# Altium PCB 家庭版电针仪.PcbDoc (part 1 of 2)
Units mm, origin at the board's own origin, x right, y up, seen from the top; angles counter-clockwise.
Board outline 170 x 90 mm, 2 copper layers (Top Layer, Bottom Layer); 197 components, 135 nets, 622 pads, 473 vias.
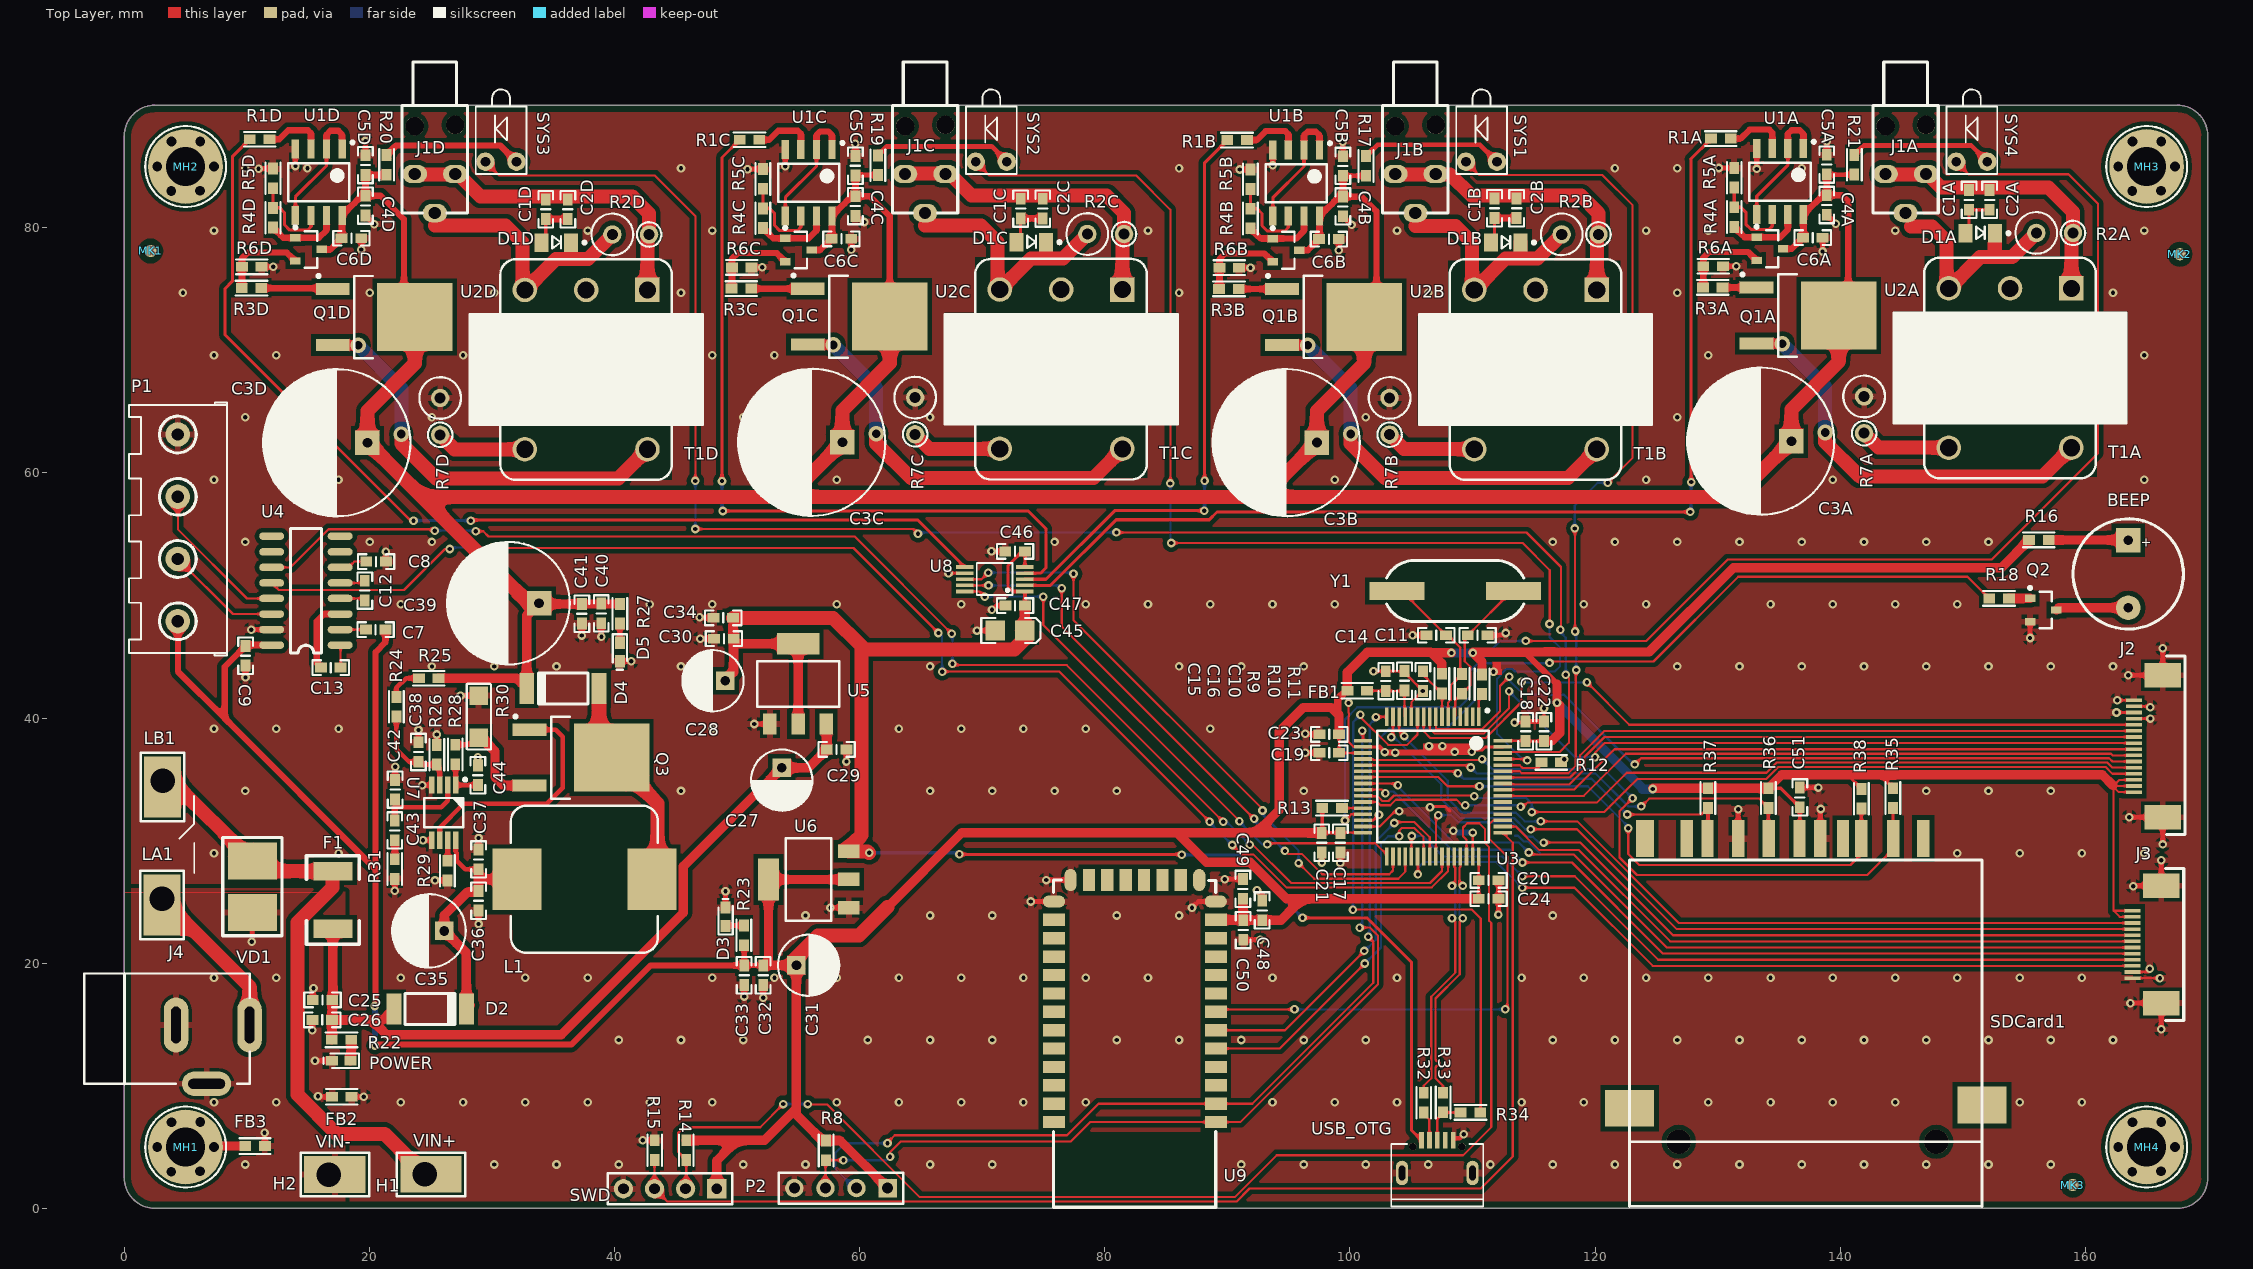
[diagram p0: Top Layer view]
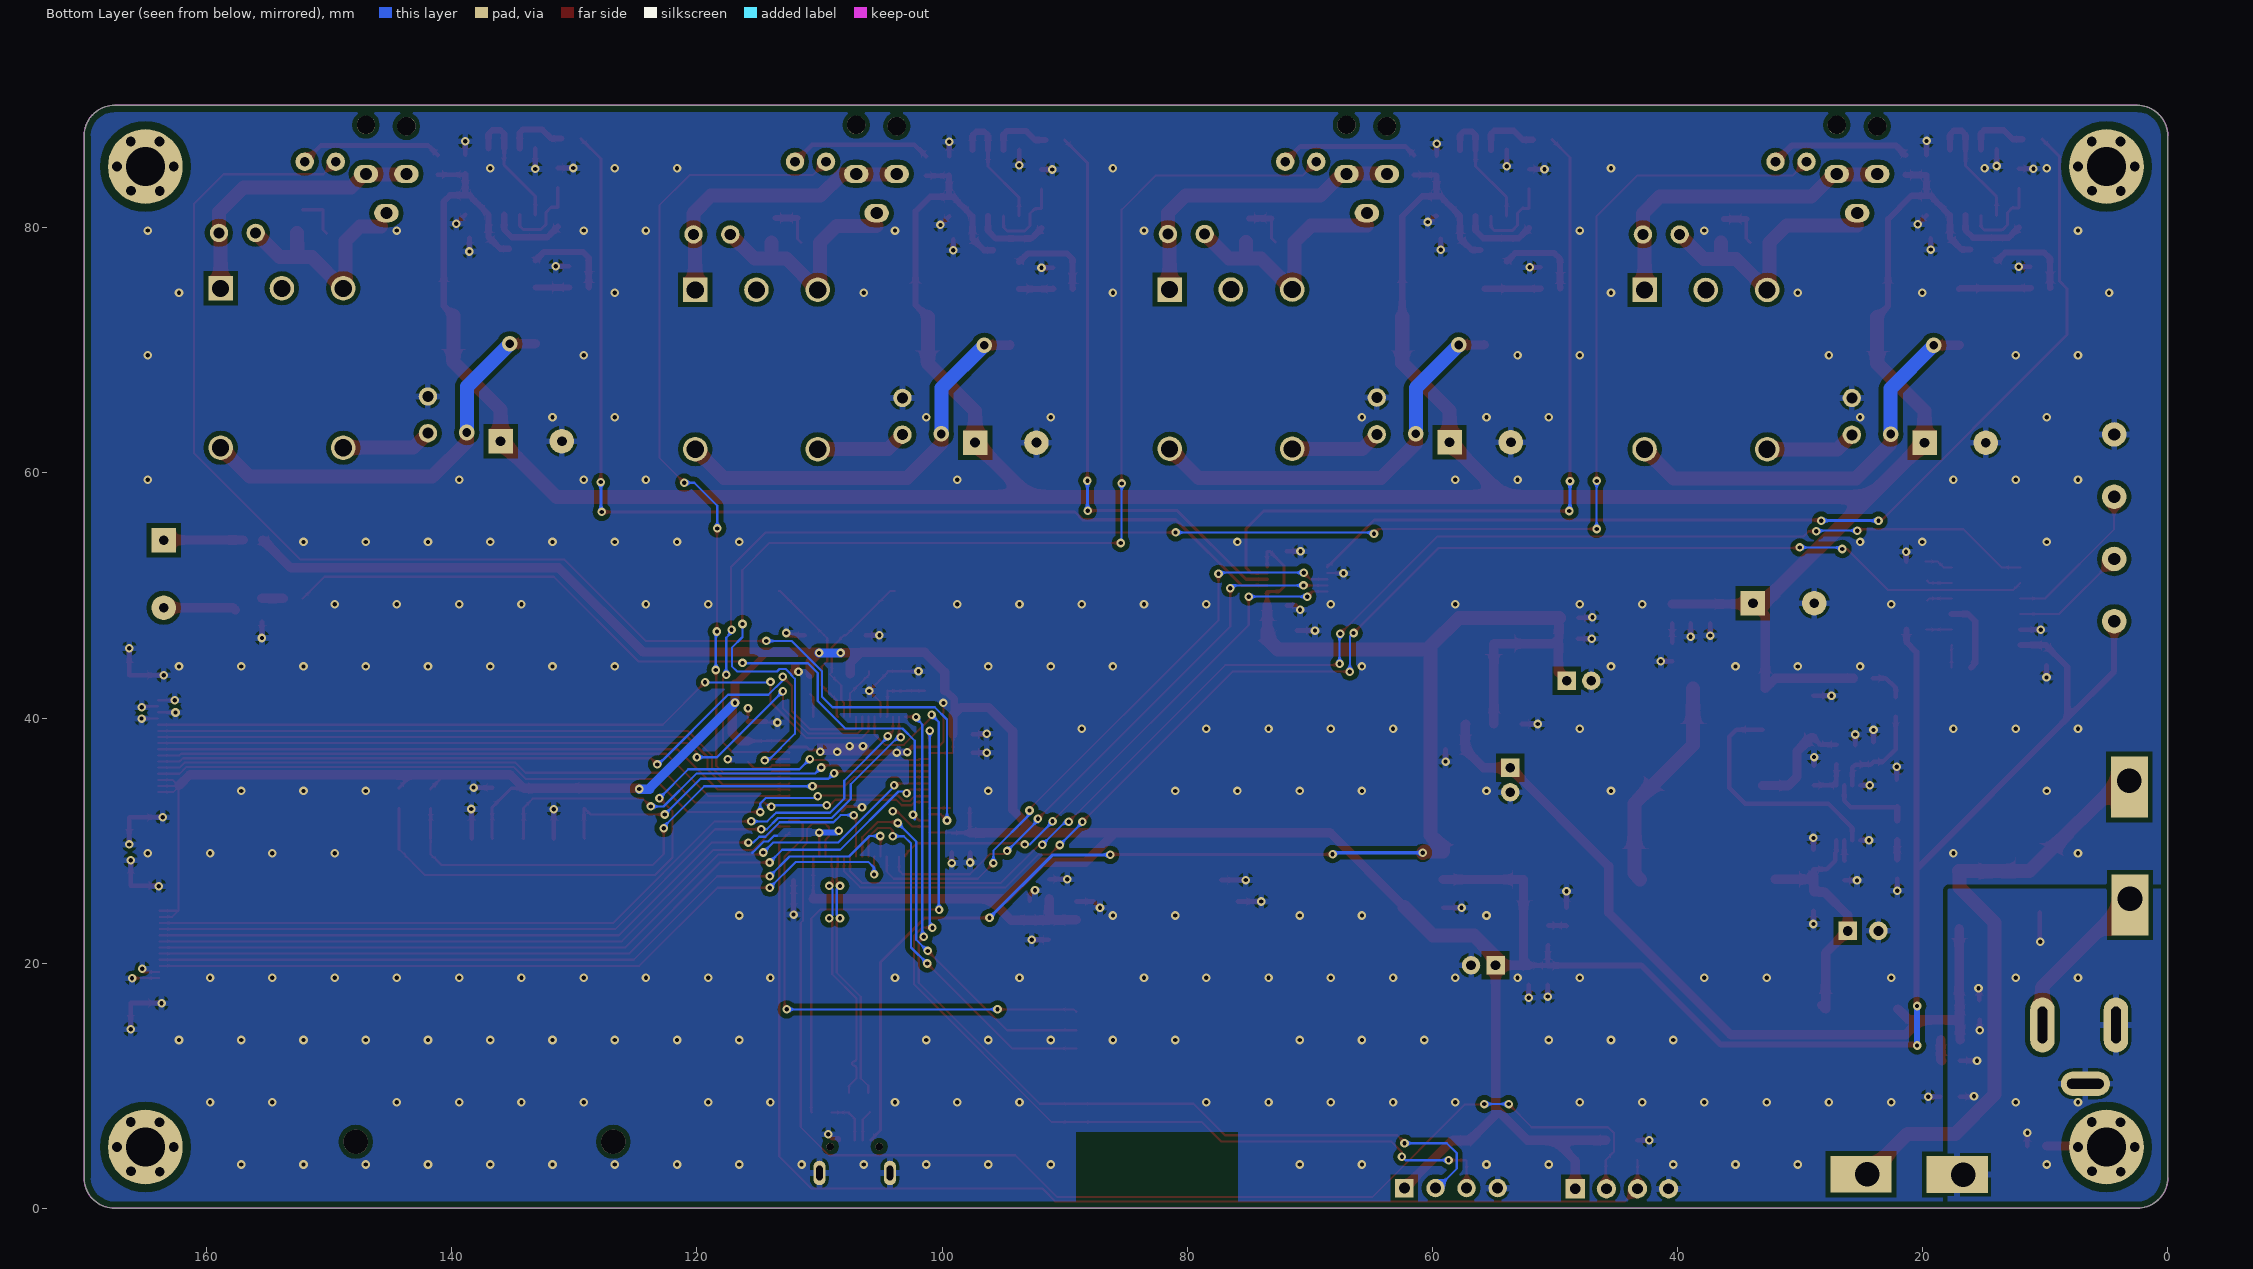
[diagram p1: Bottom Layer view, seen from below]

## Layer stack, top to bottom
Top Solder: solder mask 0.0102, Solder Resist, Dk 3.5
Top Layer: signal copper 0.0356
Dielectric 1: dielectric 0.32, FR-4, Dk 4.8
Bottom Layer: signal copper 0.0356
Bottom Solder: solder mask 0.0102, Solder Resist, Dk 3.5

## Board outline
2.5,0 cw(c2.5,2.5) 0,2.5 0,87.5 cw(c2.5,87.5) 2.5,90 167.5,90 cw(c167.5,87.5) 170,87.5 170,2.5 cw(c167.5,2.5) 167.5,0

## Design rules (kind name [scope] priority, off if disabled: settings)
AcuteAngle [All] p1: minimum=4.50000000000000E+0001 checktracksonly=TRUE // 默认角
Clearance Clearance_MK [(Component Like 'MK*')] p1: gap=0.508
Clearance Clearance_keep [InPolygon vs OnLayer('Keep-Out Layer')] p2: gap=0.508
Clearance Clearance_MH [InPolygon vs HasFootprint('AS_D3mm-6mm')] p3: gap=0.635
Clearance Clearance_poly [InPolygon] p4: gap=0.381 // 更改敷铜间距设置，默认20mil
Clearance Clearance_via_all [isvia] p5: gap=0.178 // 过孔安全间距设置，默认7mil
Clearance Clearance_pad_all [ispad] p6: gap=0.178 // 焊盘安全间距设置，默认7mil
Clearance Clearance_All [All] p7: gap=0.178 // 全局安全间距设置，默认7mil
ComponentClearance [All] p1: gap=0.102 collisioncheckmode=3 verticalgap=0.102 showdistances=FALSE
DiffPairsRouting DiffPairsRouting_all [(InDifferentialPairClass('All Differential Pairs'))] p1: maxlimit=0.178 minlimit=0.178 mostfreqgap=0.178 toplayer_minwidth=0.381 toplayer_maxwidth=0.381 toplayer_prefwidth=0.381 bottomlayer_minwidth=0.381 bottomlayer_maxwidth=0.381 bottomlayer_prefwidth=0.381 maxuncoupledlength=12.7 // 更改差分在每层
HoleSize [All] p1: absolutevalues=TRUE maxlimit=10 minlimit=0.025 maxpercent=80.000 minpercent=20.000
HoleToHoleClearance [All] p1: gap=0.102 allowstackedmicrovias=TRUE
Length [All] p1: maxlimit=2539.975 minlimit=0
MatchedLengths DiffPair_MatchedLengths [InDifferentialPair ('RXIN1') Or InDifferentialPair ('RXIN2') Or InDifferentialPair ('RXIN0') Or InDifferentialPair ('RXCLK')] p1: tolerance=2.54 checknetsindiffpair=TRUE checkdiffpairvsdiffpair=TRUE checkothers=TRUE
MinimumSolderMaskSliver [All] p1: minsoldermaskwidth=0.102
PlaneClearance PlaneClearance_via [isvia] p1: clearance=0.508 // 过孔在Plane层的隔离大小设置，在过孔密
PlaneClearance PlaneClearance_all [All] p2: clearance=0.508
PlaneConnect PlaneConnect_via [isvia] p1: planeconnectstyle=Direct reliefexpansion=0.508 reliefentries=4 reliefconductorwidth=0.254 reliefairgap=0.254 // 电源地在plane层过孔全连接
PlaneConnect PlaneConnect_all [All] p2: planeconnectstyle=Relief reliefexpansion=0.508 reliefentries=4 reliefconductorwidth=0.254 reliefairgap=0.254
PolygonConnect PolygonConnect_DGND [InNet('DGND')] p1: connectstyle=Relief reliefconductorwidth=0.508 reliefentries=4 polygonreliefangle="90 Angle" airgapwidth=0.254
PolygonConnect PolygonConnect_via [isvia] p2: connectstyle=Direct reliefconductorwidth=0.254 reliefentries=4 polygonreliefangle="90 Angle" airgapwidth=0.254 // 敷铜过孔全连接
PolygonConnect PolygonConnect_AGND [InNet('AGND')] p3: connectstyle=Relief reliefconductorwidth=0.508 reliefentries=4 polygonreliefangle="90 Angle" airgapwidth=0.254 // 敷铜过孔全连接
PolygonConnect PolygonConnect_all [All] p4: connectstyle=Direct reliefconductorwidth=0.254 reliefentries=4 polygonreliefangle="90 Angle" airgapwidth=0.254
RoutingCorners [All] p1: cornerstyle=45-Degree minsetback=1.27 maxsetback=1.27
RoutingVias RoutingVias_all [All] p1: holewidth=0.35 width=0.7 viastyle="Through Hole" minholewidth=0.35 minwidth=0.7 maxholewidth=0.9 maxwidth=1.27 // 更改过孔设置，默认最小12/24mil 最大20/40mil
SMDNeckDown [All] p1: percent=200.000
ShortCircuit [(Component Like 'MH*') vs InNet('No Net') and isvia] p1: allowed=TRUE
SilkToSilkClearance [All] p1: silktosilkclearance=0.102
SilkToSolderMaskClearance SilkscreenOverComponentPads [IsPad] p1: minsilkscreentomaskgap=0.102 clearancetoexposedcopper=TRUE
SolderMaskExpansion [All] p1: expansion=0.102
Width Width_all [All] p1: maxlimit=2.54 minlimit=0.178 preferedwidth=0.178
19 further rules are at their usual default settings.

## Classes and differential pairs
component class DAC1: C1A C2A C3A C4A C5A C6A D1A J1A Q1A R1A R2A R3A R4A R5A R6A R7A T1A U1A U2A
component class DAC2: C1B C2B C3B C4B C5B C6B D1B J1B Q1B R1B R2B R3B R4B R5B R6B R7B T1B U1B U2B
component class DAC3: C1C C2C C3C C4C C5C C6C D1C J1C Q1C R1C R2C R3C R4C R5C R6C R7C T1C U1C U2C
component class DAC4: C1D C2D C3D C4D C5D C6D D1D J1D Q1D R1D R2D R3D R4D R5D R6D R7D T1D U1D U2D
component class MCU: BEEP C7 C8 C9 C10 C11 C12 C13 C14 C15 C16 C17 C18 C19 C20 C21 C22 C23 C24 C48 C49 C50 C51 FB1 J2 J3 P1 P2 Q2 R8 R9 R10 R11 R12 R13 R14 R15 R16 R17 R18 R19 R20 R21 R32 R33 R34 R35 R36 R37 R38 SDCard1 SWD SYS1 SYS2 SYS3 SYS4 U3 U4 U9 USB_OTG Y1
component class U_P01-Power: C25 C26 C27 C28 C29 C30 C31 C32 C33 C34 C35 C36 C37 C38 C39 C40 C41 C42 C43 C44 D2 D3 D4 D5 F1 FB2 FB3 H1 H2 J4 L1 LA1 LB1 MH1 MH2 MH3 MH4 MK1 MK2 MK3 POWER Q3 R22 R23 R24 R25 R26 R27 R28 R29 R30 R31 U5 U6 U7 VD1
component class U_P03-DAC_OUTPUT: C45 C46 C47 U8
net class DAC_OUT[1..4]: DAC_OUT1 DAC_OUT2 DAC_OUT3 DAC_OUT4
channel class DAC_OUT: DAC1 DAC2 DAC3 DAC4
differential pair USB: +USB_P -USB_N

## Components (designator, comment, footprint, x,y, rotation, side; value= is the part's Value field where it differs from the comment)
BEEP "BEEP" 蜂鸣器 163.5,54.5 r270 top
C1A "100pF" Cap0603 150.509,82.275 r90 top (schematic designator C1)
C1B "100pF" Cap0603 111.792,81.597 r90 top (schematic designator C1)
C1C "100pF" Cap0603 73.133,81.571 r90 top (schematic designator C1)
C1D "100pF" Cap0603 34.38,81.513 r90 top (schematic designator C1)
C2A "100pF" Cap0603 152.185,82.275 r90 top (schematic designator C2)
C2B "100pF" Cap0603 113.595,81.597 r90 top (schematic designator C2)
C2C "100pF" Cap0603 74.936,81.571 r90 top (schematic designator C2)
C2D "100pF" Cap0603 36.184,81.513 r90 top (schematic designator C2)
C3A "220uF/50V" CapPol1_D12 133.516,62.593 r180 top (schematic designator C3)
C3B "220uF/50V" CapPol1_D12 94.799,62.474 r180 top (schematic designator C3)
C3C "220uF/50V" CapPol1_D12 56.09,62.499 r180 top (schematic designator C3)
C3D "220uF/50V" CapPol1_D12 17.337,62.466 r180 top (schematic designator C3)
C4A "10nf" Cap0603 138.901,81.864 r90 top (schematic designator C4)
C4B "10nf" Cap0603 99.422,81.745 r90 top (schematic designator C4)
C4C "10nf" Cap0603 59.646,81.77 r90 top (schematic designator C4)
C4D "10nf" Cap0603 19.674,81.813 r90 top (schematic designator C4)
C5A "100nf" Cap0603 138.901,85.166 r270 top (schematic designator C5)
C5B "100nf" Cap0603 99.422,85.047 r270 top (schematic designator C5)
C5C "100nf" Cap0603 59.646,85.072 r270 top (schematic designator C5)
C5D "100nf" Cap0603 19.674,85.115 r270 top (schematic designator C5)
C6A "100nf" Cap0603 137.758,79.197 r180 top (schematic designator C6)
C6B "100nf" Cap0603 98.279,79.078 r180 top (schematic designator C6)
C6C "100nf" Cap0603 58.503,79.103 r180 top (schematic designator C6)
C6D "100nf" Cap0603 18.531,79.146 r180 top (schematic designator C6)
C7 "0.1u" Cap0603 20.506,47.219 r0 top
C8 "0.1u" Cap0603 20.542,52.765 r0 top
C9 "0.1u" Cap0603 9.888,45.085 r270 top
C10 "100nf" Cap0603 105.948,43.017 r90 top
C11 "22pf" Cap0603 110.414,46.761 r180 top
C12 "0.1u" Cap0603 19.621,50.399 r270 top
C13 "0.1u" Cap0603 16.848,44.12 r0 top
C14 "22pf" Cap0603 107.036,46.761 r0 top
C15 "100nf" Cap0603 102.926,43.017 r270 top
C16 "10nf" Cap0603 104.45,43.042 r270 top
C17 "100nf" Cap0603 99.217,29.834 r90 top
C18 "100nf" Cap0603 114.33,38.928 r270 top
C19 "100nf" Cap0603 98.303,37.175 r0 top
C20 "100nf" Cap0603 111.314,26.761 r180 top
C21 "10uf/16V" Cap0603 97.693,29.834 r90 top
C22 "10uf/16V" Cap0603 115.829,38.928 r270 top
C23 "10uf/16V" Cap0603 98.303,38.674 r0 top
C24 "10uf/16V" Cap0603 111.314,25.263 r180 top
C25 "1uf" Cap0603 16.168,17 r0 top
C26 "100nf" Cap0603 16.143,15.375 r0 top
C27 "10uF/25V" CapPol1_D5 53.639,34.944 r270 top
C28 "22uF/16V" CapPol1_D5 48.026,43.046 r180 top
C29 "100nf" Cap0603 58.115,37.44 r180 top
C30 "100nf" Cap0603 48.916,46.48 r0 top
C31 "22uF/16V" CapPol1_D5 55.832,19.833 r0 top
C32 "100nf" Cap0603 52.123,19.02 r90 top
C33 "10nf" Cap0603 50.574,19.02 r90 top
C34 "100nf" Cap0603 48.865,48.181 r0 top
C35 "47uF/25V" CapPol1_D6 24.855,22.639 r180 top
C36 "1uf" Cap0603 28.901,25.093 r90 top
C37 "100nf" Cap0603 28.901,28.471 r270 top
C38 "100nf" Cap0603 23.999,37.234 r270 top
C39 "470uF/50V" CapPol1_D10 31.339,49.375 r180 top
C40 "10uf" Cap0603 37.334,48.512 r90 top
C41 "100nf" Cap0603 38.908,48.537 r90 top
C42 "1nf" Cap0603 22.094,34.161 r270 top
C43 "22nf" Cap0603 22.068,30.833 r90 top
C44 "10nf" Cap0603 28.85,35.329 r270 top
C45 "10uF/16V" CAPPLO3_A_3216-18 72.263,47.142 r180 top
C46 "1u" Cap0603 72.679,53.602 r0 top
C47 "0.1u" Cap0603 72.683,49.18 r0 top
C48 "22u" Cap0603 92.837,24.308 r270 top
C49 "4.7u" Cap0603 91.262,26.06 r270 top
C50 "0.1u" Cap0603 91.288,22.708 r90 top
C51 "0.1u" Cap0603 136.703,33.528 r90 top
D1A "IN4148" DIOMELF2513N 151.525,77.706 r0 top (schematic designator D1)
D1B "IN4148" DIOMELF2513N 112.808,76.949 r0 top (schematic designator D1)
D1C "IN4148" DIOMELF2513N 74.098,76.974 r0 top (schematic designator D1)
D1D "IN4148" DIOMELF2513N 35.345,76.941 r0 top (schematic designator D1)
D2 "1N5822" 1N5822 22.01,16.264 r0 top
D3 "RED" LED0603 49.05,23.643 r90 top
D4 "1N5822" 1N5822 38.731,42.416 r180 top
D5 "RED" LED0603 40.432,45.54 r270 top
F1 "2A/20V" 1812 15.113,27.534 r270 top
FB1 "0R,5%" FB0603 100.589,42.23 r0 top
FB2 "0R" FB0603 17.748,9.1 r0 top
FB3 "0R" FB0603 10.668,5.08 r180 top
H1 "VIN+" HOLE_POWER 24.522,2.776 r180 top
H2 "VIN-" HOLE_POWER 16.67,2.758 r180 top
J1A "安规插头" 安规插头 148,93.396 r270 top (schematic designator J1)
J1B "安规插头" 安规插头 108,93.396 r270 top (schematic designator J1)
J1C "安规插头" 安规插头 68,93.396 r270 top (schematic designator J1)
J1D "安规插头" 安规插头 28,93.396 r270 top (schematic designator J1)
J2 "FPC16_0.5" FPC0.5-16P 166.04,37.592 r90 top
J3 "FPC12-0.5" FPC0.5-12P 165.024,21.539 r270 top
J4 "PWR2.5" KLD-0202 4.216,14.961 r0 top
L1 "330mH" Inductor_12x12x7 37.537,26.845 r0 top
LA1 "HOLE_POWER" HOLE_POWER 3.073,25.248 r90 top
LB1 "HOLE_POWER" HOLE_POWER 3.124,34.874 r90 top
MH1 "MH" AS_D3mm-6mm 5,5 r0 top
MH2 "MH" AS_D3mm-6mm 5,85 r0 top
MH3 "MH" AS_D3mm-6mm 165,85 r0 top
MH4 "MH" AS_D3mm-6mm 165,5 r0 top
MK1 "Mark" MK 2.147,78.112 r0 top
MK2 "Mark" MK 167.711,77.847 r90 top
MK3 "Mark" MK 158.975,1.9 r90 top
P1 "接线柱" 4P接线柱5.08mm 4.369,47.904 r90 top
P2 "Header 4" HDR1X4#1 62.281,1.651 r180 top
POWER "RED" LED0603 17.845,12.047 r180 top
Q1A "S8050" SOT-23B 134.253,78.29 r0 top (schematic designator Q1)
Q1B "S8050" SOT-23B 94.774,78.171 r0 top (schematic designator Q1)
Q1C "S8050" SOT-23B 54.997,78.196 r0 top (schematic designator Q1)
Q1D "S8050" SOT-23B 15.025,78.239 r0 top (schematic designator Q1)
Q2 "S8050" SOT-23B 156.566,48.819 r0 top
Q3 "IPI04N03LA" TO228 36.851,36.599 r270 top
R1A "1K,5%" Res0603 130.265,87.278 r0 top (schematic designator R1)
R1B "1K,5%" Res0603 90.786,87.159 r0 top (schematic designator R1)
R1C "1K,5%" Res0603 51.01,87.185 r0 top (schematic designator R1)
R1D "1K,5%" Res0603 11.038,87.228 r0 top (schematic designator R1)
R2A "30K/1W" Res_Power_5.0_4.0 155.995,79.585 r0 top (schematic designator R2)
R2B "30K/1W" Res_Power_5.0_4.0 117.278,79.466 r0 top (schematic designator R2)
R2C "30K/1W" Res_Power_5.0_4.0 78.569,79.492 r0 top (schematic designator R2)
R2D "30K/1W" Res_Power_5.0_4.0 39.816,79.458 r0 top (schematic designator R2)
R3A "22R,5%" Res0603 129.605,75.14 r180 top (schematic designator R3)
R3B "22R,5%" Res0603 90.126,75.021 r180 top (schematic designator R3)
R3C "22R,5%" Res0603 50.349,75.047 r180 top (schematic designator R3)
R3D "22R,5%" Res0603 10.377,75.09 r180 top (schematic designator R3)
R4A "30k,1%" Res0603 131.357,80.881 r90 top (schematic designator R4)
R4B "30k,1%" Res0603 91.878,80.762 r90 top (schematic designator R4)
R4C "30k,1%" Res0603 52.102,80.787 r90 top (schematic designator R4)
R4D "30k,1%" Res0603 12.13,80.83 r90 top (schematic designator R4)
R5A "10K,1%" Res0603 131.357,84.081 r270 top (schematic designator R5)
R5B "10K,1%" Res0603 91.878,83.962 r270 top (schematic designator R5)
R5C "10K,1%" Res0603 52.102,83.987 r270 top (schematic designator R5)
R5D "10K,1%" Res0603 12.13,84.03 r270 top (schematic designator R5)
R6A "470R,5%" Res0603 129.63,76.868 r180 top (schematic designator R6)
R6B "470R,5%" Res0603 90.151,76.748 r180 top (schematic designator R6)
R6C "470R,5%" Res0603 50.375,76.774 r180 top (schematic designator R6)
R6D "470R,5%" Res0603 10.403,76.817 r180 top (schematic designator R6)
R7A "1R/1W" Res_Power_5.0_4.0 141.949,66.243 r270 top (schematic designator R7)
R7B "1R/1W" Res_Power_5.0_4.0 103.232,66.124 r270 top (schematic designator R7)
R7C "1R/1W" Res_Power_5.0_4.0 64.522,66.149 r270 top (schematic designator R7)
R7D "1R/1W" Res_Power_5.0_4.0 25.77,66.116 r270 top (schematic designator R7)
R8 "10K,5%" Res0603 57.252,4.724 r90 top
R9 "10K,5%" Res0603 107.498,42.814 r90 top
R10 "1M,5%" Res0603 109.149,42.788 r90 top
R11 "10K,5%" Res0603 110.774,42.763 r90 top
R12 "10K,5%" Res0603 116.424,36.389 r180 top
R13 "10K,5%" Res0603 98.538,32.654 r0 top
R14 "10K,5%" Res0603 45.847,4.75 r90 top
R15 "10K,5%" Res0603 43.282,4.75 r90 top
R16 "22,5%" Res0603 156.21,54.534 r180 top
R17 "5K,5%" Res0603 101.309,85.048 r90 top
R18 "100,5%" Res0603 152.959,49.759 r180 top
R19 "5K,5%" Res0603 61.486,85.109 r90 top
R20 "5K,5%" Res0603 21.395,85.137 r90 top
R21 "5K,5%" Res0603 141.152,85.141 r90 top
R22 "4K7,5%" Res0603 17.718,13.749 r180 top
R23 "510R,5%" Res0603 50.548,22.271 r270 top
R24 "3K3,5%" Res0603 22.195,40.917 r270 top
R25 "10K,5%" Res0603 24.837,43.254 r0 top
R26 "1K,5%" Res0603 25.497,37.005 r90 top
R27 "4K7,5%" Res0603 40.432,48.512 r90 top
R28 "100R,5%" Res0603 26.996,37.031 r90 top
R29 "200K,5%" Res0603 26.361,27.557 r90 top
R30 "0.0033R" 1206A 28.926,41.831 r270 top
R31 "4K7,5%" Res0603 22.068,27.684 r90 top
R32 "10,5%" Res0603 106.019,8.63 r270 top
R33 "10,5%" Res0603 107.594,8.636 r270 top
R34 "1.5K,5%" Res0603 109.83,7.823 r180 top
R35 "45K,5%" Res0603 144.297,33.477 r90 top
R36 "45K,5%" Res0603 134.137,33.477 r90 top
R37 "45K,5%" Res0603 129.21,33.477 r90 top
R38 "45K,5%" Res0603 141.732,33.426 r90 top
SDCard1 "SDCard" SDCard 144.323,30.175 r180 top
SWD "Header 4" HDR1X4#2 48.336,1.6 r180 top
SYS1 "RED" 坐式LED 112,85.396 r180 top
SYS2 "RED" 坐式LED 72,85.396 r180 top
SYS3 "RED" 坐式LED 32,85.396 r180 top
SYS4 "RED" 坐式LED 152,85.396 r180 top
T1A "Transformer" Transformer_19_19 154.598,67.952 r180 top (schematic designator T1)
T1B "Transformer" Transformer_19_19 115.881,67.833 r180 top (schematic designator T1)
T1C "Transformer" Transformer_19_19 77.172,67.858 r180 top (schematic designator T1)
T1D "Transformer" Transformer_19_19 38.419,67.825 r180 top (schematic designator T1)
U1A "TLE2142CD" SOIC127P600X175-8N 135.091,83.769 r270 top (schematic designator U1)
U1B "TLE2142CD" SOIC127P600X175-8N 95.612,83.65 r270 top (schematic designator U1)
U1C "TLE2142CD" SOIC127P600X175-8N 55.836,83.675 r270 top (schematic designator U1)
U1D "TLE2142CD" SOIC127P600X175-8N 15.864,83.718 r270 top (schematic designator U1)
U2A "IPI04N03LA" TO228P1003X238-3N 137.377,72.847 r0 top (schematic designator U2)
U2B "IPI04N03LA" TO228P1003X238-3N 98.66,72.728 r0 top (schematic designator U2)
U2C "IPI04N03LA" TO228P1003X238-3N 59.95,72.753 r0 top (schematic designator U2)
U2D "IPI04N03LA" TO228P1003X238-3N 21.198,72.72 r0 top (schematic designator U2)
U3 "STM32F103RC" QFP50P1200X1200X160-64N 106.761,34.406 r270 top
U4 "MAX232" SO-16 17.61,45.949 r180 top
U5 "AMS1117-5.0" AMS1117 52.674,39.516 r0 top
U6 "AMS1117-3.3" AMS1117 59.108,24.532 r90 top
U7 "LM3478" SOP65P490X110-8N 26.056,32.281 r270 top
U8 "AD5304" MSOP10 73.466,50.325 r180 top
U9 "ELET114A" ELET114A 89.052,7.036 r180 top
USB_OTG "MicroUSB-B-H" MICROUSB-B-H 107.188,3.48 r90 top
VD1 "BF091M" B3D230L 10.439,26.238 r270 top
Y1 "8MHz" XTAL_49SMD 108.585,50.368 r180 top

## Footprints (in the part's own frame and the unit in brackets; to place one, negate y for a bottom-side part, rotate by r counter-clockwise, add the part's x,y. Pads: shape width x height; smd on the part's side, far side on the other; paste and mask are expansions set on the pad)
1N5822 [mm]
  rect 1.2x2.5 smd: A(0,0) C(5.9,0)
  silkscreen extent 0.89,-1.27 4.95,1.27
4P接线柱5.08mm [mm]
  round 2 hole 1: 1(0,0) 2(5.08,0) 3(10.16,0) 4(15.24,0)
  silkscreen extent -2.8,-4 17.84,4
1206A [mil]
  rect 60x60 smd: 1(0,0) 2(135,0)
  silkscreen extent -38,-39 173,39
1812 [mil]
  rect 60x125 smd: 1(1,75) 2(186,75)
  silkscreen extent -49,-10 236,160
AMS1117 [mm]
  rect 1.1x1.75 smd: 1(0,0) 2(2.3,0) 3(4.6,0)
  rect 3.45x1.75 smd: 4(2.3,6.55)
  silkscreen extent -1.05,1.43 5.65,5.13, body extent -0.95,-0.2 5.55,6.76, height 1.7
AS_D3mm-6mm [mm] "内径3mm，外径7mm"
  round 6.1 hole 3.2: MH1(0,0)
  silkscreen extent -3.3,-3.3 3.3,3.3
B3D230L [mm]
  rect 3x4 smd: 1(-2.1,0) 2(2.1,0)
  silkscreen extent -4,-2.41 4,2.41
Cap0603 [mm] "0603电容"
  rect 0.965x0.8 smd: 1(-0.8,0) 2(0.8,0)
  silkscreen extent -1.48,-0.6 1.48,0.6
CAPPLO3_A_3216-18 [mm] "A型封装=32*16-18(长*宽-高，单位:mm)"
  rect 1.6x1.6 smd: 1(-1.2,0) 2(1.2,0)
  silkscreen extent -2.48,-1.02 2.34,1.02
CapPol1_D5 [mm] "极性电容（径向）D5，间距F2.0"
  rect 1.5x1.5 hole 0.8: 1(-1,0)
  round 1.5 hole 0.8: 2(1,0)
  silkscreen extent -2.5,-2.54 2.54,2.54
CapPol1_D6 [mm] "极性电容（径向）D6，间距F2.5"
  rect 1.5x1.5 hole 0.8: 1(-1.25,0)
  round 1.524 hole 0.8: 2(1.25,0)
  silkscreen extent -3,-3 3,3
CapPol1_D10 [mm] "极性电容（径向）D10，间距F5.0"
  rect 2x2 hole 0.8: 1(-2.5,0)
  round 2 hole 0.8: 2(2.5,0)
  silkscreen extent -5,-5 5,5
CapPol1_D12 [mm] "极性电容（径向）D12，间距F5.0"
  rect 2x2 hole 0.8: 1(-2.5,0)
  round 2 hole 0.8: 2(2.5,0)
  silkscreen extent -6,-6 6,6
DIOMELF2513N [mm]
  rect 1.15x1.5 smd: A(-1.302,1.854) C(1.098,1.854)
  silkscreen extent -0.43,1.38 2.32,2.38
ELET114A [mm]
  rect 1.8x1 smd: 1(0,0) 2(0,-1.5) 3(0,-3) 4(0,-4.5) 5(0,-6) 6(0,-7.5) 7(0,-9) 8(0,-10.5) 9(0,-12) 10(0,-13.5) 11(0,-15) 12(0,-16.5) 23(13.2,-16.5) 24(13.2,-15) 25(13.2,-13.5) 26(13.2,-12) 27(13.2,-10.5) 28(13.2,-9) 29(13.2,-7.5) 30(13.2,-6) 31(13.2,-4.5) 32(13.2,-3) 33(13.2,-1.5) 34(13.2,0)
  oval 1.8x1 smd: 13(0,-18) 22(13.2,-18)
  oval 1x1.8 smd: 14(1.35,-19.75) 21(11.85,-19.75)
  rect 1x1.8 smd: 15(2.85,-19.75) 16(4.35,-19.75) 17(5.85,-19.75) 18(7.35,-19.75) 19(8.85,-19.75) 20(10.35,-19.75)
  silkscreen extent 0,-19.75 13.25,6.95
FB0603 [mm] "0603磁珠"
  rect 0.965x0.8 smd: 1(-0.8,0) 2(0.8,0)
  silkscreen extent -1.27,-0.64 1.27,0.64
FPC0.5-12P [mm] "FPC0.5-12P;0.5mm;"
  rect 0.3x1.3 smd mask+0.051: 1(-2.744,-1.175) 2(-2.244,-1.175) 3(-1.744,-1.175) 4(-1.244,-1.175) 5(-0.744,-1.175) 6(-0.244,-1.175) 7(0.256,-1.175) 8(0.756,-1.175) 9(1.256,-1.175) 10(1.756,-1.175) 11(2.256,-1.175) 12(2.756,-1.175)
  rect 2x3 smd mask+0.051: 13(-4.787,1.175) 14(4.788,1.175)
  silkscreen extent -6.2,1.5 6.2,3
FPC0.5-16P [mm] "FPC0.5-16P;0.5mm"
  rect 0.3x1.3 smd mask+0.051: 1(-3.633,2.081) 2(-3.133,2.081) 3(-2.633,2.081) 4(-2.133,2.081) 5(-1.633,2.081) 6(-1.133,2.081) 7(-0.633,2.081) 8(-0.133,2.081) 9(0.367,2.081) 10(0.867,2.081) 11(1.367,2.081) 12(1.867,2.081) 13(2.367,2.081) 14(2.867,2.081) 15(3.367,2.081) 16(3.867,2.081)
  rect 2x3 smd mask+0.051: 17(-5.676,-0.268) 18(5.91,-0.269)
  silkscreen extent -7.09,-2.09 7.47,-0.59
HDR1X4#1 [mm] "Connector; Header; 4 Position"
  rect 1.5x1.5 hole 0.9: 1(0,0)
  round 1.5 hole 0.9: 2(2.54,0) 3(5.08,0) 4(7.62,0)
  silkscreen extent -1.27,-1.27 8.89,1.27
HDR1X4#2 [mm]
  rect 1.575x1.575 hole 0.889: 1(0,0)
  round 1.575 hole 0.889: 2(2.54,0) 3(5.08,0) 4(7.62,0)
  silkscreen extent -1.27,-1.27 8.89,1.27
HOLE_POWER [mm] "电源接线孔"
  rect 5x3 hole 2 copper offset -0.5,0: 1(0,0)
  silkscreen extent -3.3,-1.78 2.29,1.78
Inductor_12x12x7 [mm]
  rect 4x5 smd: 1(-5.5,0) 2(5.5,0)
  silkscreen extent -6,-6 6,6
KLD-0202 [mm] "DC Power Jack, 2.5mm, KLD Series, PCB Mount"
  oval 4x2 hole 0.8 slot 3 at 0 deg: 2(2.5,-4.8)
  oval 2x4.5 hole 0.8 slot 3 at 90 deg: 3(0,0) 4(6,0)
  silkscreen extent -7.5,-4.8 6,4.2
LED0603 [mm]
  rect 1x0.8 smd: A(-0.6,0) K(0.9,0)
  silkscreen extent -1.3,-0.58 1.6,0.58
MICROUSB-B-H [mm]
  rect 1.35x0.4 smd mask+0.051: 1(2.082,1.363) 2(2.082,0.714) 3(2.082,0.064) 4(2.082,-0.587) 5(2.082,-1.236)
  oval 2x1 hole 0.5 slot 1.2 at 0 deg: 6(-0.593,2.939) 7(-0.593,-2.812)
  round 0.61 hole 0.61 mask+0.051: " "(1.557,2.063) " "(1.557,-1.936)
  silkscreen extent -3.34,-3.69 1.78,3.81
MK [mm] "贴片Mark点"
  round 1 smd mask+0.5: MK(0,0)
MSOP10 [mm]
  rect 1.4x0.3 smd: 1(0,0) 2(0,-0.5) 3(0,-1) 4(0,-1.5) 5(0,-2) 6(4.9,-2) 7(4.9,-1.5) 8(4.9,-1) 9(4.9,-0.5) 10(4.9,0)
  silkscreen extent 0.99,-2.34 3.91,0.28
QFP50P1200X1200X160-64N [mm] "QFP50P1200X1200X160-64N"
  rect 1.5x0.3 smd: 1(-5.7,3.75) 2(-5.7,3.25) 3(-5.7,2.75) 4(-5.7,2.25) 5(-5.7,1.75) 6(-5.7,1.25) 7(-5.7,0.75) 8(-5.7,0.25) 9(-5.7,-0.25) 10(-5.7,-0.75) 11(-5.7,-1.25) 12(-5.7,-1.75) 13(-5.7,-2.25) 14(-5.7,-2.75) 15(-5.7,-3.25) 16(-5.7,-3.75) 33(5.7,-3.75) 34(5.7,-3.25) 35(5.7,-2.75) 36(5.7,-2.25) 37(5.7,-1.75) 38(5.7,-1.25) 39(5.7,-0.75) 40(5.7,-0.25) 41(5.7,0.25) 42(5.7,0.75) 43(5.7,1.25) 44(5.7,1.75) 45(5.7,2.25) 46(5.7,2.75) 47(5.7,3.25) 48(5.7,3.75)
  rect 0.3x1.5 smd: 17(-3.75,-5.7) 18(-3.25,-5.7) 19(-2.75,-5.7) 20(-2.25,-5.7) 21(-1.75,-5.7) 22(-1.25,-5.7) 23(-0.75,-5.7) 24(-0.25,-5.7) 25(0.25,-5.7) 26(0.75,-5.7) 27(1.25,-5.7) 28(1.75,-5.7) 29(2.25,-5.7) 30(2.75,-5.7) 31(3.25,-5.7) 32(3.75,-5.7) 49(3.75,5.7) 50(3.25,5.7) 51(2.75,5.7) 52(2.25,5.7) 53(1.75,5.7) 54(1.25,5.7) 55(0.75,5.7) 56(0.25,5.7) 57(-0.25,5.7) 58(-0.75,5.7) 59(-1.25,5.7) 60(-1.75,5.7) 61(-2.25,5.7) 62(-2.75,5.7) 63(-3.25,5.7) 64(-3.75,5.7)
  silkscreen extent -6.32,-4.55 4.55,4.58
Res0603 [mm] "0603电阻"
  rect 0.965x0.8 smd: 1(-0.8,0) 2(0.8,0)
  silkscreen extent -1.28,-0.6 1.28,0.6
Res_Power_5.0_4.0 [mm]
  round 1.5 hole 0.9: 1(0,0) 2(3,0)
  silkscreen extent -1.7,-1.7 4,1.7
SDCard [mm] "SDCard卡槽"
  round 2 hole 2 unplated: 0(-3.5,24.75) 0(17.5,24.75)
  rect 1x3 smd: 1(0,0) 2(2.6,0.001) 3(5.95,0.001) 4(7.65,0.001) 5(10.15,0.001) 6(12.65,0.001) 7(15.15,0.001) 8(16.85,0.001) 9(-2.45,0) 11(4.1,0)
  rect 1.5x3 smd: 10(20.25,0.001)
  rect 4x3 smd: 12(-7.25,21.75) 13(21.5,22)
  silkscreen extent -7.24,1.75 21.52,30
SO-16 [mil]
  oval 80x24 smd: 1(0,0) 2(0,-50) 3(0,-100) 4(0,-150) 5(0,-200) 6(0,-250) 7(0,-300) 8(0,-350) 9(220,-350) 10(220,-300) 11(220,-250) 12(220,-200) 13(220,-150) 14(220,-100) 15(220,-50) 16(220,0)
  silkscreen extent 60,-375 160,25
SOIC127P600X175-8N [mm]
  rect 1.55x0.6 smd: 1(-2.7,1.905) 2(-2.7,0.635) 3(-2.7,-0.635) 4(-2.7,-1.905) 5(2.7,-1.905) 6(2.7,-0.635) 7(2.7,0.635) 8(2.7,1.905)
  silkscreen extent -3.37,-2.5 1.55,2.88
SOP65P490X110-8N [mm]
  rect 1.4x0.45 smd: 1(-2.25,0.975) 2(-2.25,0.325) 3(-2.25,-0.325) 4(-2.25,-0.975) 5(2.25,-0.975) 6(2.25,-0.325) 7(2.25,0.325) 8(2.25,0.975)
  silkscreen extent -2.82,-1.6 1.2,1.88
SOT-23B [mm] "SOT23, 3-Leads, Body 2.9x1.3mm, Pitch 0.95mm, Lead Span 2.4mm, IPC High Density"
  rect 0.85x0.6 smd: 1(-1.075,0.95) 2(-1.075,-0.95) 3(1.075,0)
  silkscreen extent -1.2,-1.5 0.7,1.92, body extent -0.7,-1.5 0.7,1.5, height 1.14
TO228 [mm]
  rect 1x2.75 smd: 1(-2.458,-3.794) 3(2.102,-3.794)
  rect 5.55x6.15 smd: 2(-0.178,2.906)
  silkscreen extent -3.65,-5.07 3.17,-0.52
TO228P1003X238-3N [mm]
  rect 2.75x1 smd: 1(-4.2,2.28) 3(-4.2,-2.28)
  rect 6.15x5.55 smd: 2(2.5,0)
  silkscreen extent -5.47,-3.35 -0.92,3.47
Transformer_19_19 [mm]
  rect 2x2 hole 1.4: 1(-4.26,-7.107)
  round 2 hole 1.4: 2(0.74,-7.107) 3(5.74,-7.107) 4(-4.26,5.893) 6(5.74,5.893)
  silkscreen extent -8.76,-9.61 10.24,8.39
XTAL_49SMD [mm] "49SMD无源晶振"
  rect 4.5x1.5 smd: 1(-4.75,0) 2(4.75,0)
  silkscreen extent -5.59,-2.5 5.59,2.5
坐式LED [mm]
  round 1.5 hole 0.8: A(0,0) K(2.54,0)
  silkscreen extent -0.81,-5.9 3.33,1
安规插头 [mm]
  oval 1.5x2 hole 1: 1(9,-1) 1(9,-4.3) 2(12.192,-2.667)
  round 1.5 hole 1.5: 3(5,-1) 3(5.1,-4.3)
  silkscreen extent -0.13,-5.33 12.19,0
蜂鸣器 [mm]
  rect 2x2 hole 0.762: 1(0,0)
  round 2 hole 0.762: 2(5.5,0)
  silkscreen extent -1.76,-4.5 7.24,4.5

## Part data
BEEP: library part BELL
C1A C1B C1C C1D C2A C2B C2C C2D C4A C4B C4C C4D C5A C5B C5C C5D C6A C6B C6C C6D C7 C8 C9 C10 C11 C12 C13 C14 C15 C16 C17 C18 C19 C20 C21 C22 C23 C24 C25 C26 C29 C30 C32 C33 C34 C36 C37 C38 C40 C41 C42 C43 C44 C46 C47 C48 C49 C50 C51: library part "Cap Semi", "无极性电容（表贴）"
C3A C3B C3C C3D C27 C28 C31 C35 C39: library part "Cap Pol1", "极性电容（径向）"
C45: library part "Cap Pol3", "极性电容（表贴）"
D1A D1B D1C D1D: library part Dio_IN4148
D2 D4: library part DIODE, "肖基特二极管"
D3 D5 POWER SYS1 SYS2 SYS3 SYS4: library part LED, "Typical RED, GREEN, YELLOW, AMBER GaAs LED"
F1: library part Fuse, "保险丝"
FB1 FB2 FB3: library part FerriteBead, "磁珠"
H1 H2: library part HOLE_POWER, "电源接线孔"
J4: "低电压电源连接器"
L1: library part Inductor, "电感"
LA1 LB1: "电源接线孔"
MH1 MH2 MH3 MH4: "固定孔"
MK1 MK2 MK3: "贴片马克点"
P1: library part "Header 4", "Header, 4-Pin"
P2 SWD: "Header, 4-Pin"
Q1A Q1B Q1C Q1D Q2: "NPN"
Q3 U2A U2B U2C U2D: "N沟道MOS管"
R1A R1B R1C R1D R3A R3B R3C R3D R4A R4B R4C R4D R5A R5B R5C R5D R6A R6B R6C R6D R8 R9 R10 R11 R12 R13 R14 R15 R16 R17 R18 R19 R20 R21 R22 R23 R24 R25 R26 R27 R28 R29 R30 R31 R32 R33 R34 R35 R36 R37 R38: library part Res, "电阻"
R2A R2B R2C R2D R7A R7B R7C R7D: library part Res, "功率电阻"
SDCard1: "SDCard插座"
T1A T1B T1C T1D: "变压器"
U1A U1B U1C U1D: "运放"
U4: library part MAX232AEWE(16), "+-15KV ESD-PROTECTED, +5V RS-232 TRANSCEIVERS"
U5: library part AMS1117-3.3, "稳压器"
U6: "稳压器"
USB_OTG: "手机接口型USB"
VD1: library part B3D230L
Y1: library part XTAL, "晶体振荡器"

## Via types
v1: diameter 0.7, hole 0.35, Top Layer to Bottom Layer, tented both sides, 441 vias
v2: diameter 1.2, hole 0.8, Top Layer to Bottom Layer, tented both sides, 24 vias
v3: diameter 1.27, hole 0.711, Top Layer to Bottom Layer, tented both sides, 8 vias

## Nets (pads, with @x,y where several pads share a name; then routed paths per layer and width w, separated by ;. In a path a pad name is that pad's centre, name@x,y a point inside that pad or via, vN(x,y) a via of type N, cw(c..) or ccw(c..) an arc to the next point about the centre after c; other vN are vias at no path point)
232-RX: P1.3 U4.13 | length 12.7
  Top Layer w0.178: P1.3@4.369,58.064 4.369,55.397 10.008,49.759 U4.13@12.022,49.759
232-TX: P1.2 U4.14 | length 9.5
  Top Layer w0.178: P1.2@4.369,52.984 8.865,48.489 U4.14@12.022,48.489
A0: J3.3 U3.14 | length 68.5
  Top Layer w0.178: U3.14@104.011,40.106 104.011,38.94 v1(104.419,38.532) v1@104.267,38.532 ; v1(115.57,31.572) 118.542,31.572 126.83,23.284 J3.3@163.849,23.284
  Bottom Layer w0.178: v1(104.419,38.532) 104.419,38.456 107.975,34.9 107.975,33.443 109.142,32.276 113.537,32.276 113.664,32.149 113.672,32.149 114.249,31.572 v1(115.57,31.572)
A1: J3.4 U3.15 | length 69.4
  Top Layer w0.178: v1(103.378,38.43) 103.511,38.563 U3.15@103.511,40.106 ; v1(114.757,30.937) 118.516,30.937 126.67,22.784 J3.4@163.849,22.784
  Bottom Layer w0.178: v1(103.378,38.43) 103.607,38.43 107.442,34.595 107.442,33.401 108.407,32.436 108.411,32.436 108.995,31.852 113.386,31.852 114.3,30.937 v1(114.757,30.937)
A8: J3.5 U3.41 | length 64.2
  Top Layer w0.178: U3.41@107.011,28.707 107.011,31.898 v1(107.193,32.08) ; v1(115.799,29.845) 118.796,29.845 126.357,22.284 J3.5@163.849,22.284
  Bottom Layer w0.178: v1(107.193,32.08) 108.264,32.08 108.848,31.496 113.238,31.496 114.414,30.32 114.917,30.32 115.392,29.845 v1(115.799,29.845)
A15: J3.6 U3.50 | length 55.3
  Top Layer w0.178: U3.50@112.461,31.156 113.522,31.156 115.45,29.228 118.689,29.228 126.134,21.784 J3.6@163.849,21.784
AGND: C25.1 C26.1 FB2.1 FB3.1 H2.1 J4.2 J4.3 POWER.K VD1.2 | length 8.1
  Top Layer w0.381: v1(10.404,21.761) 10.439,21.726 VD1.2@10.439,24.138 ; v1(11.441,6.162) 11.468,6.135 FB3.1@11.468,5.08 ; v1(15.343,14.524) C26.1@15.343,15.375 ; C25.1@15.368,17 15.368,17.899 v1(15.438,17.968) ; v1(15.56,12.05) 15.562,12.047 POWER.K@16.945,12.047 ; v1(15.804,9.152) 15.855,9.1 FB2.1@16.948,9.1
  Bottom Layer w0.381: v1(10.404,21.761) v1@10.404,21.843 ; v1(15.343,14.524) v1@15.377,14.49
  other v1: 9.859,3.575 7.319,8.655 12.399,8.655 7.319,18.815 12.399,18.815
BEEP: R18.2 U3.30 | length 65.9
  Top Layer w0.178: U3.30@101.061,31.657 101.919,31.657 v1(102.369,32.106) ; v1@116.281,44.612 124.766,44.612 131.685,51.531 150.387,51.531 R18.2@152.159,49.759
  Bottom Layer w0.178: v1(102.369,32.106) 102.369,31.871 102.221,31.723 102.221,38.145 103.224,39.149 107.897,39.149 110.142,41.393 110.142,43.682 110.935,44.476 116.256,44.476 v1(116.281,44.501)
BOOT0: R12.2 U3.60 | length 3.7
  Top Layer w0.178: U3.60@112.461,36.156 113.853,36.156 114.083,35.927 115.336,35.927 115.711,36.302 R12.2@115.842,36.432
BOOT1: R13.2 U3.28 | length 1.7
  Top Layer w0.178: R13.2@99.338,32.654 101.059,32.654 U3.28@101.061,32.657
BT_WAKEUP: U3.39 U9.5 | length 31.6
  Top Layer w0.178: U9.5@89.052,13.036 94.274,13.036 v1(101.217,19.978) v1@101.171,19.978 ; v1(104.021,30.365) 104.021,30.833 104.213,31.025 105.254,31.025 106.011,30.269 U3.39@106.011,28.707
  Bottom Layer w0.178: v1(101.217,19.978) 102.528,21.289 102.528,29.778 103.115,30.365 v1(104.021,30.365)
CMA/DATA_SWITCH: U3.40 U9.6 | length 31.3
  Top Layer w0.178: U9.6@89.052,14.536 94.702,14.536 v1(101.171,21.004) v1@101.171,20.921 ; v1@103.849,31.527 105.255,31.527 106.511,30.271 U3.40@106.511,28.707
  Bottom Layer w0.178: v1(101.171,21.004) 101.201,21.004 102.11,21.913 102.11,29.938 v1(103.61,31.437) v1@103.61,31.636
DAC_OUT1: R1A.1 U8.2 | length 88
  Top Layer w0.254: U8.2@73.466,50.825 75.565,50.825 80.924,56.185 88.519,56.185 89.154,56.82 v1(127.762,56.82) ; v1(127.838,59.258) 127.838,85.55 127.787,85.601 R1A.1@129.465,87.278
  Bottom Layer w0.254: v1(127.762,56.82) 127.838,56.896 v1(127.838,59.258)
DAC_OUT2: R1B.1 U8.3 | length 48
  Top Layer w0.254: U8.3@73.466,51.325 75.201,51.325 80.797,56.921 v1(88.113,56.921) ; v1(88.138,59.36) 88.138,85.311 R1B.1@89.986,87.159
  Bottom Layer w0.254: v1(88.113,56.921) 88.138,56.947 v1(88.138,59.36)
DAC_OUT3: R1C.1 U8.4 | length 63
  Top Layer w0.254: v1(48.762,59.341) 48.762,85.737 R1C.1@50.21,87.185 ; v1(48.819,56.896) 73.762,56.896 75.184,55.474 75.184,52.248 74.762,51.825 U8.4@73.466,51.825
  Bottom Layer w0.254: v1(48.762,59.341) 48.762,56.953 v1(48.819,56.896)
DAC_OUT4: R1D.1 U8.6 | length 85.4
  Top Layer w0.254: R1D.1@10.238,87.228 8.815,85.805 8.815,75.641 8.212,75.038 8.212,71.264 23.597,55.88 v1(23.597,56.109) ; v1(28.27,56.109) 28.321,56.159 64.732,56.159 U8.6@68.566,52.325
  Bottom Layer w0.254: v1(23.597,56.109) v1(28.27,56.109)
DC3V3: C7.2 C9.1 C17.2 C18.2 C19.2 C20.2 C21.2 C22.2 C23.2 C24.2 C31.1 C32.2 C33.2 C48.2 C49.2 C50.2 C51.1 FB1.1 J2.1 J2.2 J2.3 J3.1 J3.2 P1.1 P2.1 R8.2 R9.2 R11.2 R13.1 R14.2 R16.2 R23.2 R35.2 R36.2 R37.2 R38.2 SDCard1.4 SWD.1 U3.19 U3.32 U3.48 U3.64 U4.16 U6.2 U6.4 U9.12 | length 429.9
  Top Layer w0.178: C23.2@99.103,38.674 C19.2@99.103,37.175 99.121,37.156 U3.19@101.061,37.156 ; C17.2@99.217,30.635 99.239,30.656 U3.32@101.061,30.656 ; U3.48@110.511,28.707 110.514,28.704 C20.2@110.514,26.761 C24.2@110.514,25.263 ; U3.64@112.461,38.156 114.301,38.156 C18.2@114.33,38.128 C22.2@115.829,38.128 ; J3.2@163.849,23.784 162.805,23.784 162.305,24.284 ; J3.1@163.849,24.284 162.305,24.284 ; J2.1@163.959,33.959 162.714,33.959 162.29,34.382 ; J2.2@163.959,34.459 162.29,34.459 ; J2.3@163.959,34.959 162.79,34.959 162.29,34.459 ; 162.29,34.382 162.29,24.299 162.305,24.284 ; 162.29,34.382 162.29,34.459
  Top Layer w0.254: R13.1@97.738,32.654 97.738,30.679 C21.2@97.693,30.635 C17.2@99.217,30.635 ; R36.2@134.137,34.277 135.154,34.277 C51.1@136.703,32.728 136.703,30.204 SDCard1.4@136.673,30.174 ; 140.843,35.115 R38.2@141.732,34.226 ; 143.256,35.369 144.297,34.328 R35.2@144.297,34.277
  Top Layer w0.381: R23.2@50.548,21.471 50.574,21.446 C33.2@50.574,19.82 C32.2@52.123,19.82
  Top Layer w0.508: P1.1@4.369,47.904 4.369,43.802 8.185,39.986 ; C9.1@9.888,45.885 8.185,44.182 8.185,39.986 ; C9.1@9.939,45.961 U4.16@12.009,45.961 ; 20.411,27.76 8.185,39.986 ; v1(20.447,13.284) 20.523,13.36 36.474,13.36 42.934,19.82 C33.2@50.574,19.82 ; v1(20.447,16.51) 20.498,16.561 20.498,45.364 21.306,46.172 C7.2@21.306,47.219 ; 114.253,45.386 114.275,45.364 116.891,42.748
  Top Layer w0.635: 99.103,40.267 99.009,40.361 99.009,41.554 99.685,42.23 FB1.1@99.789,42.23
  Top Layer w0.762: R14.2@45.847,5.55 50,5.55 ; SWD.1@48.336,1.6 48.336,3.886 50,5.55 ; C32.2@52.123,19.82 C32.2@52.136,19.833 ; C31.1@54.832,20.465 C31.1@54.832,19.833 ; U6.2@59.108,26.832 U6.4@52.558,26.832 52.558,20.255 C32.2@52.136,19.833 ; P2.1@62.281,1.651 58.407,5.524 R8.2@57.252,5.524 56.96,5.524 54.832,7.652 54.832,8.146 ; 62.281,24.587 68.328,30.635 85.887,30.635 ; U9.12@89.052,23.536 91.259,23.536 C50.2@91.262,23.533 ; C49.2@91.262,25.26 C50.2@91.262,23.533 ; C21.2@97.693,30.635 92.354,30.635 ; C23.2@99.103,38.674 99.103,40.267 98.476,40.869 96.19,40.869 94.234,38.913 94.234,32.514 92.354,30.635 ; FB1.1@99.789,42.23 99.789,43.731 101.422,45.364 106.604,45.364 106.629,45.339 ; R9.2@107.498,43.614 107.498,44.471 106.629,45.339 ; v1(108.28,45.314) 108.255,45.339 106.629,45.339 ; v1(110.033,45.314) 110.007,45.339 v1@110.007,45.364 ; C24.2@110.514,25.263 96.129,25.263 ; R11.2@110.774,43.563 110.774,44.598 v1@110.007,45.364 ; 114.253,45.386 115.881,45.386 115.905,45.41 116.658,45.41 116.682,45.386 124.405,45.386 131.293,52.273 153.149,52.273 R16.2@155.41,54.534 ; 114.478,45.364 114.275,45.364 v1@110.007,45.364 ; C22.2@115.829,38.128 116.461,38.128 117.119,38.786 117.119,41.021 v1(116.891,41.25) 116.891,42.748 ; v1@124.714,34.277 R37.2@129.21,34.277 R36.2@134.137,34.277 135.23,35.369 143.256,35.369 161.379,35.369 162.252,34.497 ; 50,5.55 52.235,5.55 54.832,8.146 ; C32.2@52.136,19.833 C31.1@54.832,19.833 ; 54.832,8.146 C31.1@54.832,19.833 ; 85.887,30.635 88.289,28.232 91.85,28.232 94.819,25.263 96.129,25.263 ; 85.887,30.635 92.354,30.635 ; C50.2@91.262,23.533 C50.2@91.288,23.508 C48.2@92.837,23.508 94.374,23.508 96.129,25.263
  Top Layer w1.143: C31.1@54.832,20.465 56.614,22.248 59.942,22.248 62.281,24.587
  Bottom Layer w0.508: v1(20.447,13.284) v1(20.447,16.51)
  Bottom Layer w0.762: v1(108.28,45.314) v1(110.033,45.314) ; v1(116.891,41.25) 123.85,34.29 123.85,34.188 v1@124.688,34.188
  other v1: 124.714,34.214

## Text inside footprints (layer, text, board x,y; h text height)
BEEP: Top Overlay "+" at 164.643,54.754 h0.76 r270
D1A: Mechanical 15 "1" at 151.271,78.722 h0.75 r180
D1B: Mechanical 15 "1" at 112.87,79.253 h0.75 r180
D1C: Mechanical 15 "1" at 74.161,79.278 h0.75 r180
D1D: Mechanical 15 "1" at 35.408,79.245 h0.75 r180
U1A: Mechanical 15 "1" at 134.927,83.319 h0.76
U1B: Mechanical 15 "1" at 95.448,83.2 h0.76
U1C: Mechanical 15 "1" at 55.671,83.225 h0.76
U1D: Mechanical 15 "1" at 15.699,83.268 h0.76
U3: Mechanical 15 "1" at 106.311,34.571 h0.75 r270
U7: Mechanical 15 "1" at 25.892,31.831 h0.75